# Altium PCB 4.3寸MCU_RGB.PcbDoc
Units mm, origin at the board's own origin, x right, y up, seen from the top; angles counter-clockwise.
Board outline 116.21 x 62.91 mm, 2 copper layers (Top Layer, Bottom Layer); 34 components, 57 nets, 188 pads, 216 vias.
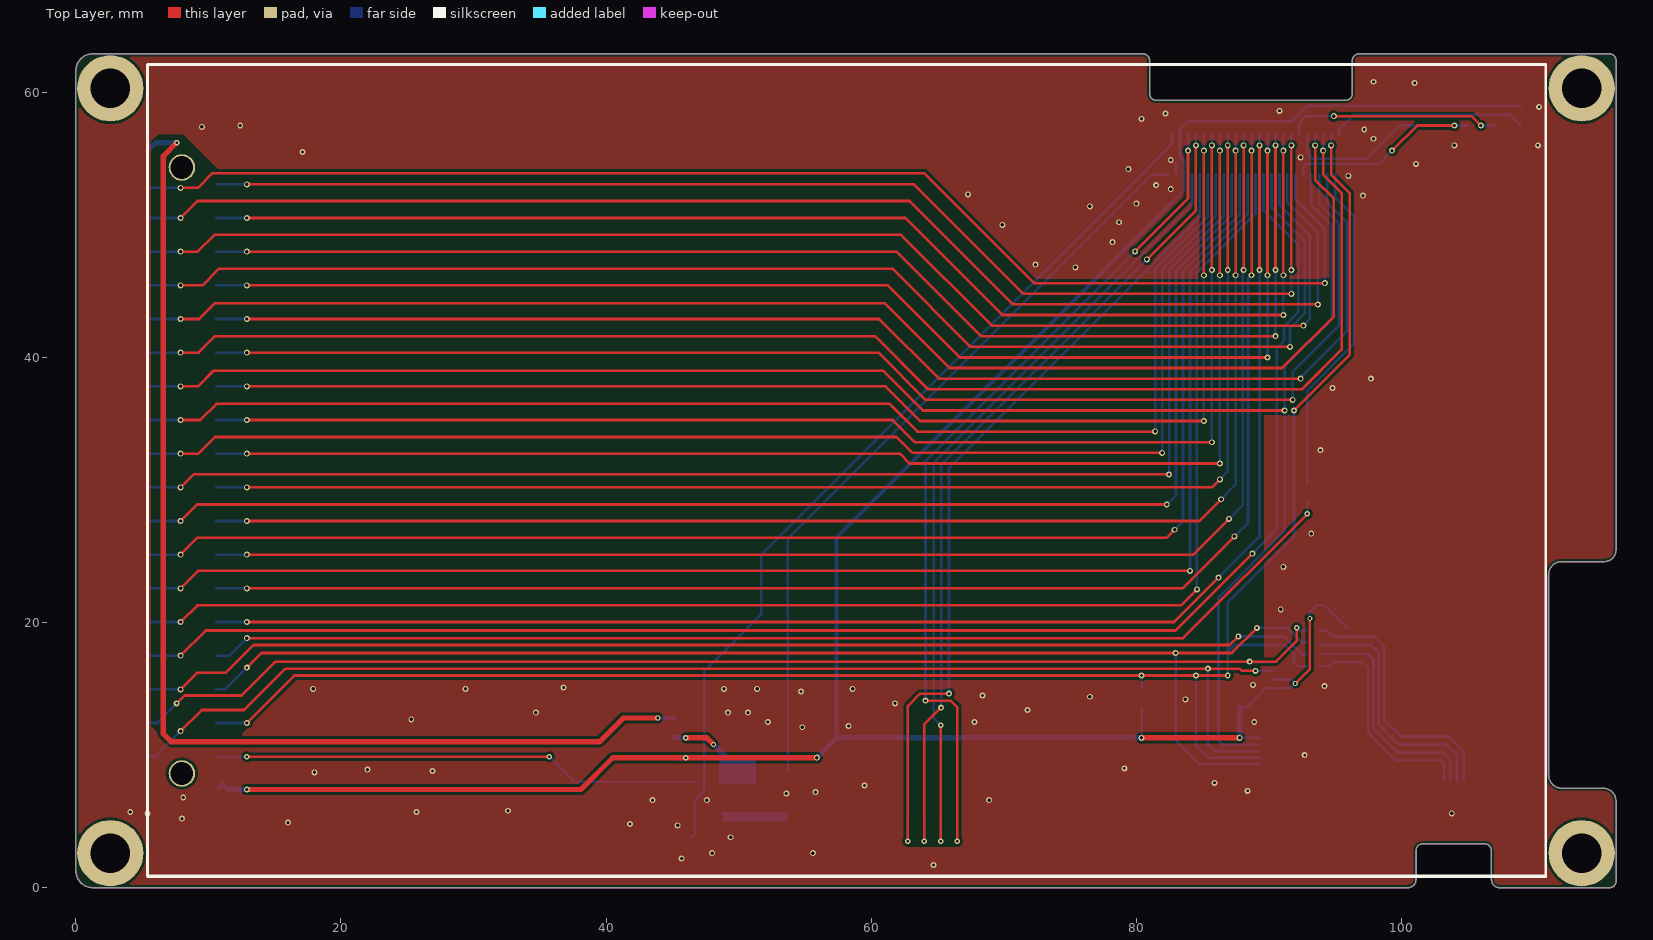
[diagram p0: Top Layer view]
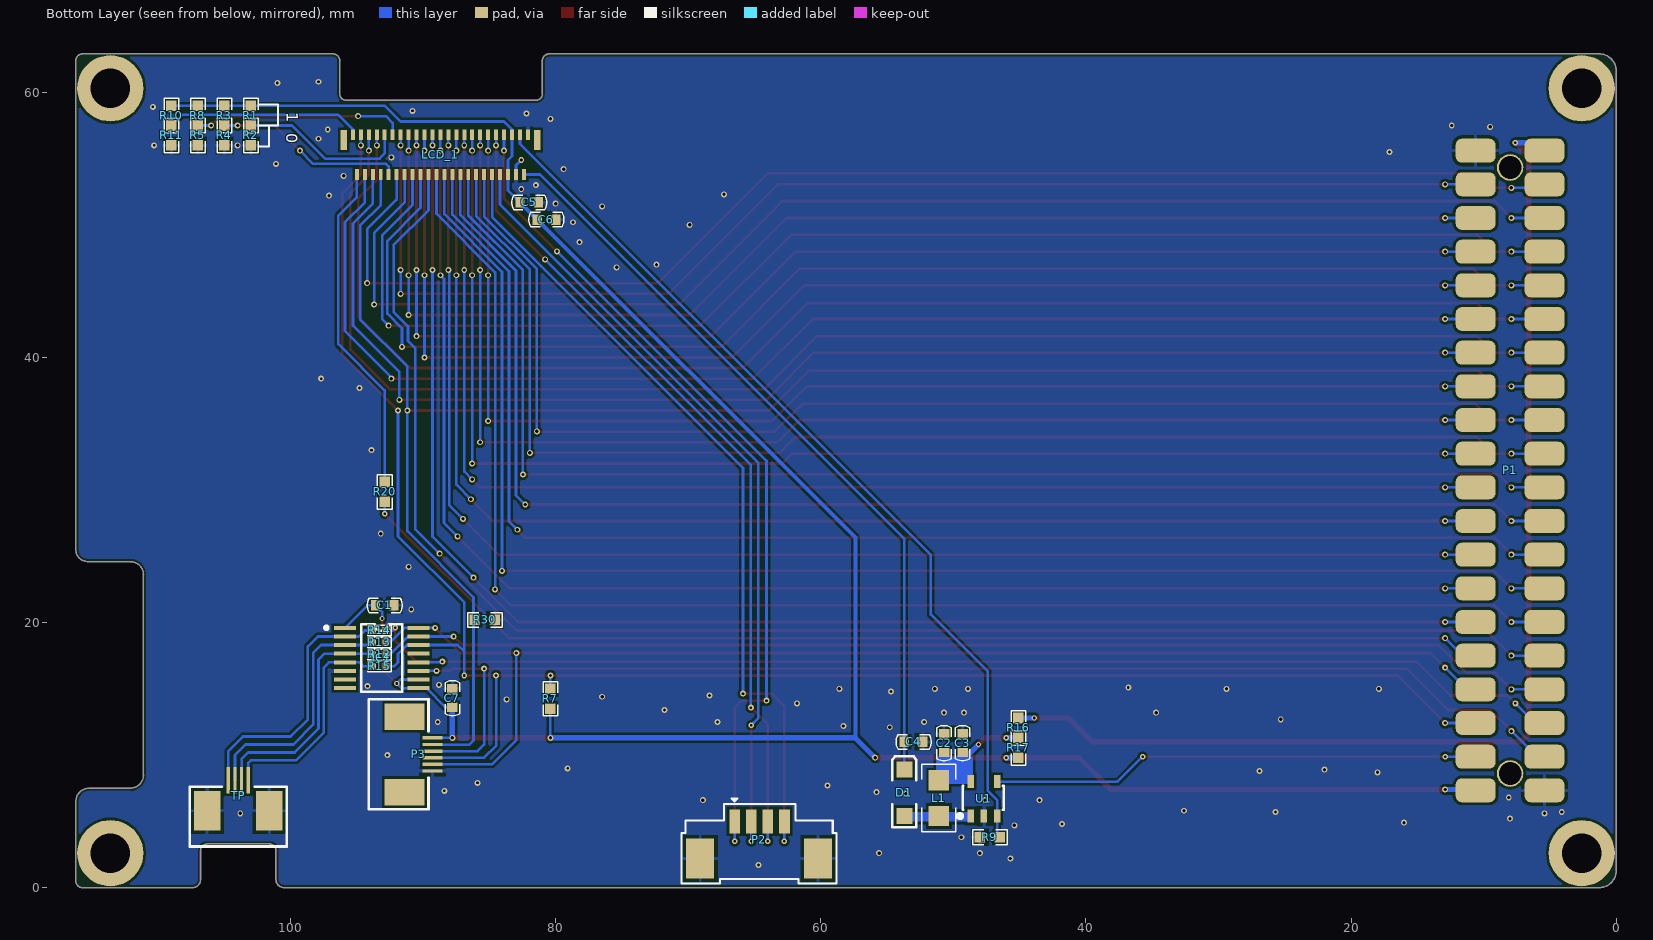
[diagram p1: Bottom Layer view, seen from below]
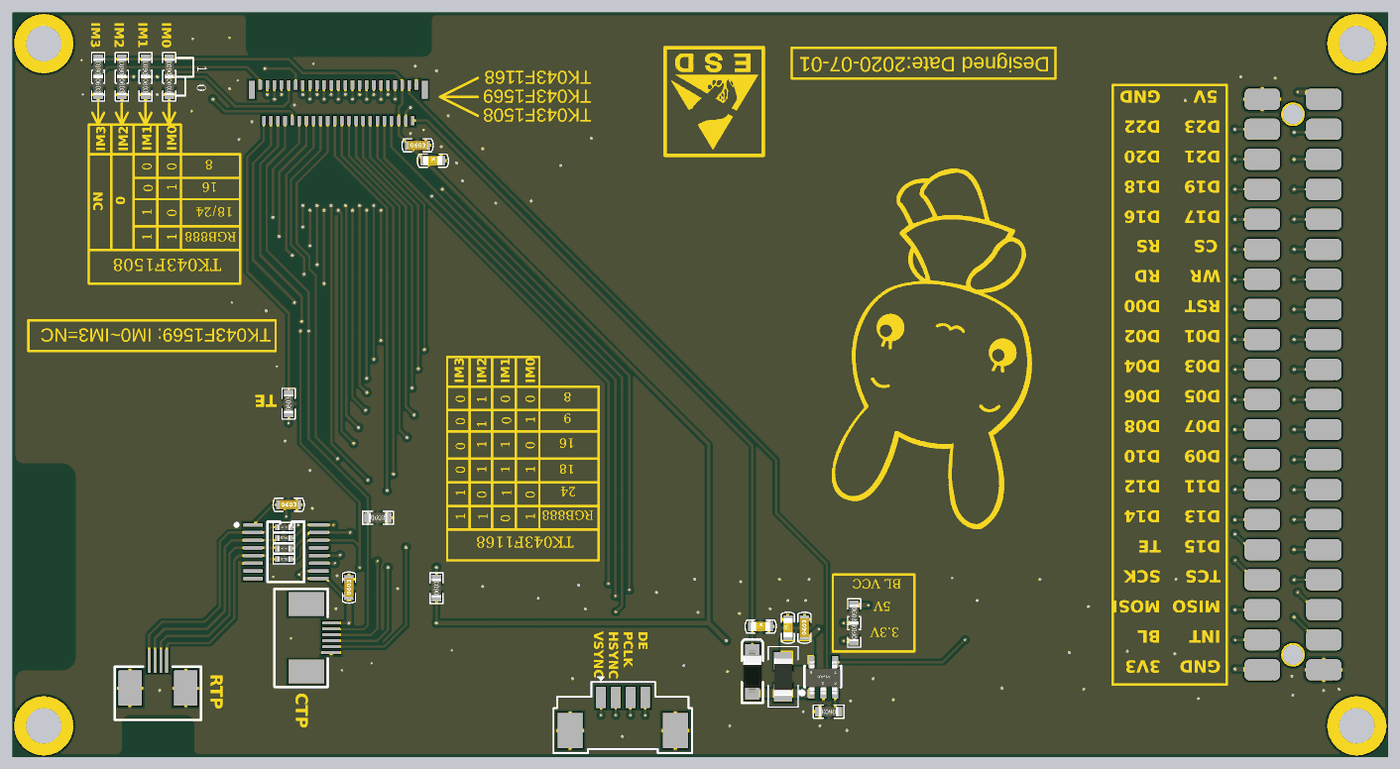
[diagram p2: 3D render of the assembled board from below, using the file's embedded part models]

## Layer stack, top to bottom
Top Solder: solder mask 0.0102, Solder Resist, Dk 3.5
Top Layer: signal copper 0.0356
Dielectric1: dielectric 0.32, FR-4, Dk 4.8
Bottom Layer: signal copper 0.0356
Bottom Solder: solder mask 0.0102, Solder Resist, Dk 3.5

## Board outline
-0.005,1.27 ccw(c1.27,1.27) 1.27,-0.005 100.5,-0.005 ccw(c100.5,0.6) 101.105,0.6 101.105,2.8 cw(c101.6,2.8) 101.6,3.295 106.3,3.295 cw(c106.3,2.8) 106.795,2.8 106.795,0.6 ccw(c107.4,0.6) 107.4,-0.005 115.7,-0.005 ccw(c115.7,0.5) 116.205,0.5 116.205,6.5 ccw(c115.2,6.5) 115.2,7.505 112.1,7.505 cw(c112.1,8.5) 111.105,8.5 111.105,23.6 cw(c112.1,23.6) 112.1,24.595 115.3,24.595 ccw(c115.3,25.5) 116.205,25.5 116.205,62.4 ccw(c115.7,62.4) 115.7,62.905 96.8,62.905 ccw(c96.8,62.4) 96.295,62.4 96.295,59.9 cw(c95.8,59.9) 95.8,59.405 81.5,59.405 cw(c81.5,59.9) 81.005,59.9 81.005,62.4 ccw(c80.5,62.4) 80.5,62.905 1.27,62.905 ccw(c1.27,61.63) -0.005,61.63

## Design rules (kind name [scope] priority, off if disabled: settings)
Clearance [All] p1: gap=0.2
ComponentClearance [All] p1 off: gap=0.254 collisioncheckmode=3 verticalgap=0.254 showdistances=FALSE
Height [All] p1 off: minheight=0 maxheight=25.4 prefheight=12.7
MinimumSolderMaskSliver [All] p1 off: minsoldermaskwidth=0.254
PolygonConnect PolygonConnect_1 [IsVia] p1: connectstyle=Direct reliefconductorwidth=0.254 reliefentries=4 polygonreliefangle="90 Angle" airgapwidth=0.254
PolygonConnect [All] p2: connectstyle=Relief reliefconductorwidth=0.254 reliefentries=4 polygonreliefangle="90 Angle" airgapwidth=0.254
RoutingVias [All] p1: holewidth=0.711 width=1.27 viastyle="Through Hole" minholewidth=0.711 minwidth=1.27 maxholewidth=0.711 maxwidth=1.27
SilkToBoardRegionClearance [All] p1 off:
SilkToSilkClearance [All] p1 off: silktosilkclearance=0.254
SilkToSolderMaskClearance [IsPad] p1 off: minsilkscreentomaskgap=0.254 clearancetoexposedcopper=TRUE
SolderMaskExpansion [All] p1: expansion=0.102
Width [All] p1: maxlimit=1 minlimit=0.2 preferedwidth=0.2 minimp=50.000000 maximp=50.000000 favimp=50.000000
24 further rules are at their usual default settings.

## Components (designator, comment, footprint, x,y, rotation, side; value= is the part's Value field where it differs from the comment)
C1 "104" C0603-1 93.6,21.3 r180 bottom
C2 "475" C0603-2 50.7,10.2 r90 bottom
C3 "104" C0603-1 49.3,10.2 r90 bottom
C4 "104" C0603-2 53.7,11 r180 bottom
C5 "104" C0603-1 82.7,51.7 r180 bottom
C6 "475" C0603-2 81.4,50.4 r180 bottom
C7 "104" C0603-1 87.8,13.6 r90 bottom
D1 "SS14" SOD123 53.7,5.4 r90 bottom
IC1 "XPT2046" SOT403-1 95.9,19.6 r180 bottom locked
L1 "4.7uH" L1206 51.1,5.4 r90 bottom
LCD_1 "TK043F1168_TK043F1508_TK043F1569" TFT_KGM1066A0 111,0.8 r90 top locked
P1 "PIN_Header_40PIN" P_Head_2x20 5.4,55.6 r270 bottom locked
P2 "BHEADSMD1x4" BHEADSMD1x4 66.5,5 r0 bottom
P3 "Capacity_Touch" TP_CAP_4.3INCH 110.3,0.8 r90 top locked
R1 "0R" R0603 103,57.5 r90 bottom
R2 "0R" R0603 103,57.5 r270 bottom
R3 "0R" R0603 105,57.5 r90 bottom
R4 "0R" R0603 105,57.5 r270 bottom
R5 "0R" R0603 107,57.5 r270 bottom
R7 "4.7K" R0603 80.4,13.5 r90 bottom
R8 "0R" R0603 107,57.5 r90 bottom
R9 "5R1" R0603 46.5,3.8 r0 bottom
R10 "0R" R0603 109,57.5 r90 bottom
R11 "0R" R0603 109,57.5 r270 bottom
R12 "0R" R0402 92.8,17.6 r0 bottom
R13 "0R" R0402 92.8,18.5 r0 bottom
R14 "0R" R0402 92.8,19.4 r0 bottom
R15 "0R" R0402 92.8,16.7 r0 bottom
R16 "0R" R0603 45.1,12.8 r270 bottom
R17 "0R" R0603 45.1,9.8 r90 bottom
R20 "0R" R0603 92.9,29.1 r90 bottom
R30 "18K" R0603 86.1,20.2 r180 bottom
TP "Resistor_Touch" TP_5.0inch 110.6,67.1 r270 top locked
U1 "MP3302" SOT23-5 48.7,5.4 r180 bottom

## Footprints (in the part's own frame and the unit in brackets; to place one, negate y for a bottom-side part, rotate by r counter-clockwise, add the part's x,y. Pads: shape width x height; smd on the part's side, far side on the other; paste and mask are expansions set on the pad)
BHEADSMD1x4 [mil]
  rect 32x71 smd: 1(0,0) 2(-49.21,0) 3(-98.43,0) 4(-147.64,0)
  rect 83x118 smd: 5(102.36,110.24) 6(-248.03,110.24)
  silkscreen extent -303,-68 158,185
C0603-1 [mm]
  rect 0.7x0.8 smd mask+0.1: 1(0,0) 2(1.4,0)
  silkscreen extent -0.62,-0.55 2.02,0.55, body extent -0.3,-0.39 1.7,0.39, height 0.79
C0603-2 [mm]
  rect 0.7x0.8 smd mask+0.1: 1(0,0) 2(1.4,0)
  silkscreen extent -0.62,-0.55 2.02,0.55, body extent -0.1,-0.4 1.5,0.4, height 0.3
L1206 [mil]
  rect 60x60 smd: 1(0,0) 2(106.3,0)
  silkscreen extent -47,-50 154,50, body extent -11,-32 115,31, height 43
P_Head_2x20 [mm]
  round 2 hole 1.7: 0(1.27,-2.6) 0(46.99,-2.6)
  rrect50% 1.8x3 smd: 1(0,0) 2(0,-5.2) 3(2.54,0) 4(2.54,-5.2) 5(5.08,0) 6(5.08,-5.2) 7(7.62,0) 8(7.62,-5.2) 9(10.16,0) 10(10.16,-5.2) 11(12.7,0) 12(12.7,-5.2) 13(15.24,0) 14(15.24,-5.2) 15(17.78,0) 16(17.78,-5.2) 17(20.32,0) 18(20.32,-5.2) 19(22.86,0) 20(22.86,-5.2) 21(25.4,0) 22(25.4,-5.2) 23(27.94,0) 24(27.94,-5.2) 25(30.48,0) 26(30.48,-5.2) 27(33.02,0) 28(33.02,-5.2) 29(35.56,0) 30(35.56,-5.2) 31(38.1,0) 32(38.1,-5.2) 33(40.64,0) 34(40.64,-5.2) 35(43.18,0) 36(43.18,-5.2) 37(45.72,0) 38(45.72,-5.2) 39(48.26,0) 40(48.26,-5.2)
R0402 [mm]
  rect 0.5x0.5 smd mask+0.1: 1(0,0) 2(1,0)
  silkscreen extent -0.4,-0.4 1.4,0.4, body extent 0,-0.25 1,0.25, height 0.35
R0603 [mm]
  rect 0.8x0.8 smd mask+0.1: 1(0,0) 2(1.5,0)
  silkscreen extent -0.55,-0.55 2.05,0.55, body extent -0.05,-0.4 1.55,0.4, height 0.45
SOD123 [mm]
  rect 1.2x1.2 smd: 1(0,0) 2(3.5,0)
  silkscreen extent -0.85,-0.9 4.5,0.9, body extent -0.05,-0.8 3.65,0.8, height 1.27
SOT23-5 [mm]
  rect 0.5x1 smd: 1(0,0) 2(1,0) 3(2,0) 4(2,2.6) 5(0,2.6)
  silkscreen extent -0.95,-0.15 2.5,2.27, body extent -0.46,-0.13 2.44,2.67, height 1.09
SOT403-1 [mm]
  rect 1.65x0.3 smd: 1(0,0) 2(0,-0.65) 3(0,-1.3) 4(0,-1.95) 5(0,-2.6) 6(0,-3.25) 7(0,-3.9) 8(0,-4.55) 9(5.55,-4.55) 10(5.55,-3.9) 11(5.55,-3.25) 12(5.55,-2.6) 13(5.55,-1.95) 14(5.55,-1.3) 15(5.55,-0.65) 16(5.55,0)
  silkscreen extent -1.53,-4.83 4.33,0.28
TFT_KGM1066A0 [mm]
  rect 1.5x0.5 smd far side: 0(55.6,15) 0(55.6,29.6)
  rect 0.8x0.3 smd far side: 1(56,15.7) 2(53,16) 3(56,16.3) 4(53,16.6) 5(56,16.9) 6(53,17.2) 7(56,17.5) 8(53,17.8) 9(56,18.1) 10(53,18.4) 11(56,18.7) 12(53,19) 13(56,19.3) 14(53,19.6) 15(56,19.9) 16(53,20.2) 17(56,20.5) 18(53,20.8) 19(56,21.1) 20(53,21.4) 21(56,21.7) 22(53,22) 23(56,22.3) 24(53,22.6) 25(56,22.9) 26(53,23.2) 27(56,23.5) 28(53,23.8) 29(56,24.1) 30(53,24.4) 31(56,24.7) 32(53,25) 33(56,25.3) 34(53,25.6) 35(56,25.9) 36(53,26.2) 37(56,26.5) 38(53,26.8) 39(56,27.1) 40(53,27.4) 41(56,27.7) 42(53,28) 43(56,28.3) 44(53,28.6) 45(56,28.9)
  silkscreen extent 0,0.1 61.3,105.6
TP_5.0inch [mm]
  rect 2x0.25 smd far side: 1(59,-7.4) 2(59,-6.9) 3(59,-6.4) 4(59,-5.9)
  rect 3x2 smd far side: 5(61.3,-9) 6(61.3,-4.3)
  silkscreen extent 5,-105.2 66.2,0.3
TP_CAP_4.3INCH [mm]
  rect 0.25x1.5 smd far side: 1(10.5,21) 2(10,21) 3(9.5,21) 4(9,21) 5(8.5,21) 6(8,21)
  rect 2x3 smd far side: 7(12.1,18.9)
  rect 2x3 smd far side paste+0: 8(6.4,18.9)
  silkscreen extent 0,-0.6 61.3,104.9

## Part data
C1 C2 C3 C4 C5 C6 C7: library part cap
D1: library part "D Schottky", "Schottky Diode"
IC1: library part ADS7843
L1: library part Inductor
LCD_1: library part TK043F1168
P3: library part BHEADSMD1x6
R1 R2 R3 R4 R5 R7 R8 R9 R10 R11 R12 R13 R14 R15 R16 R17 R20 R30: library part Resistor
TP: library part BHEADSMD1x4

## Free pads (board coordinates)
  round 5 hole 3: 2(2.6,2.6) 2(2.6,60.3) 2(113.6,2.6) 2(113.6,60.3)

## Via types
v1: diameter 0.45, hole 0.25, Top Layer to Bottom Layer, tented both sides, 173 vias
v2: diameter 0.45, hole 0.2, Top Layer to Bottom Layer, tented both sides, 27 vias
v3: diameter 0.4, hole 0.2, Top Layer to Bottom Layer, tented both sides, 16 vias

## Nets (pads, with @x,y where several pads share a name; then routed paths per layer and width w, separated by ;. In a path a pad name is that pad's centre, name@x,y a point inside that pad or via, vN(x,y) a via of type N, cw(c..) or ccw(c..) an arc to the next point about the centre after c; other vN are vias at no path point)
3.3V: C1.1 C5.1 C6.1 C7.1 IC1.1 IC1.9 IC1.10 LCD_1.40 LCD_1.41 P1.40 P3.1 R1.2 R3.2 R7.1 R8.2 R10.2 R17.1 | length 185.4
  Top Layer w0.2: v3(92,15.4) 93.1,16.5 v3(93.1,20.3)
  Top Layer w0.4: v1(12.9,7.4) 38.1,7.4 40.5,9.8 v1(55.9,9.8) ; v1(80.4,11.3) v1(87.8,11.3)
  Bottom Layer w0.2: v1(80.4,11.3) R7.1 ; C5.1 83.6,52.6 LCD_1.40 83.6,54.9 83.3,55.2 LCD_1.41 83.3,57.2 83.9,57.8 91.7,57.8 92.9,59 R1.2 R3.2 R8.2 R10.2 ; v1(87.8,11.3) P3.1 ; C7.1 88.3,13.6 89.75,15.05 91.65,15.05 v3(92,15.4) 91.7,15.7 IC1.10 ; v3(93.1,20.3) 93.1,20.8 C1.1 94.2,21.3 IC1.1
  Bottom Layer w0.3: 57.4,11.3 57.4,26.4 C5.1
  Bottom Layer w0.4: P1.40@10.8,7.54 11.06,7.8 11.46,7.4 v1(12.9,7.4) ; R17.1 v3(46,9.8) ; v1(55.9,9.8) 57.4,11.3 v1(80.4,11.3) ; v1(87.8,11.3) C7.1
5V: P1.1 R16.1 | length 87
  Top Layer w0.4: v3(7.6,56.2) 6.6,55.2 6.6,11.6 7.2,11 39.5,11 41.3,12.8 v3(43.9,12.8)
  Bottom Layer w0.4: P1.1 6,56.2 v3(7.6,56.2) ; v3(43.9,12.8) R16.1
BL_CTR: P1.38 U1.4 | length 36.9
  Top Layer w0.2: v3(12.9,9.88) v3(35.72,9.88)
  Bottom Layer w0.2: P1.38 v3(12.9,9.88) ; v3(35.72,9.88) 37.6,8 U1.4
CS: LCD_1.7 P1.11 | length 107.9
  Top Layer w0.2: v1(7.9,42.9) 9.3,42.9 10.5,44.1 27.6,44.1 61,44.1 65.9,39.2 91,39.2 94.9,43.1 94.9,52 93.5,53.4 v1(93.5,56)
  Bottom Layer w0.2: P1.11 v1(7.9,42.9) ; v1(93.5,56) LCD_1.7
D00: LCD_1.35 P1.16 | length 97.1
  Top Layer w0.2: v1(12.9,37.82) 61.08,37.82 63.7,35.2 v1(85.1,35.2) ; v1(85.1,46.2) v1(85.1,55.6)
  Bottom Layer w0.2: P1.16 v1(12.9,37.82) ; v1(85.1,35.2) v1(85.1,46.2) ; v1@85.1,55.7 LCD_1.35
D01: LCD_1.34 P1.17 | length 98.4
  Top Layer w0.2: v1(7.9,35.28) 9.38,35.28 10.6,36.5 42.6,36.5 61.4,36.5 63.5,34.4 v1@81.425,34.4
  Bottom Layer w0.2: P1.17 v1(7.9,35.28) ; v1(81.425,34.425) 81.425,46.662 85.4,50.637 LCD_1.34
D02: LCD_1.33 P1.18 | length 99
  Top Layer w0.2: v1(12.9,35.28) 61.62,35.28 63.3,33.6 v1(85.7,33.6) ; v1(85.7,46.6) v1(85.7,56)
  Bottom Layer w0.2: P1.18 v1(12.9,35.28) ; v1(85.7,33.6) v1(85.7,46.6) ; v1(85.7,56) LCD_1.33
D03: LCD_1.32 P1.19 | length 100.2
  Top Layer w0.2: v1(7.9,32.74) 9.24,32.74 10.5,34 61.9,34 63.1,32.8 v1(81.95,32.8)
  Bottom Layer w0.2: P1.19 v1(7.9,32.74) ; v1(81.95,32.8) 81.95,46.621 86,50.671 LCD_1.32
D04: LCD_1.31 P1.20 | length 100.8
  Top Layer w0.2: v1(12.9,32.74) 62.16,32.74 62.9,32 v1(86.3,32) ; v1(86.3,46.2) v1(86.3,55.6)
  Bottom Layer w0.2: P1.20 v1(12.9,32.74) ; v1(86.3,32) v1(86.3,46.2) ; v1(86.3,55.6) LCD_1.31
D05: LCD_1.30 P1.21 | length 101.8
  Top Layer w0.2: v1(7.9,30.2) 8.9,31.2 v1@82.475,31.2
  Bottom Layer w0.2: P1.21 v1(7.9,30.2) ; v1(82.475,31.175) 82.475,46.58 86.6,50.705 LCD_1.30
D06: LCD_1.29 P1.22 | length 102.2
  Top Layer w0.2: v1(12.9,30.2) 85.7,30.2 v1(86.3,30.8) ; v1(86.9,46.6) v1(86.9,56)
  Bottom Layer w0.2: P1.22 v1(12.9,30.2) ; v1(86.3,30.8) 86.9,31.4 v1(86.9,46.6) ; v1(86.9,56) LCD_1.29
D07: LCD_1.28 P1.23 | length 104.3
  Top Layer w0.2: v1(7.9,27.66) 9.14,28.9 v1(82.3,28.9)
  Bottom Layer w0.2: P1.23 v1(7.9,27.66) ; v1(82.3,28.9) 83,29.6 83,46.54 87.2,50.74 LCD_1.28
D08: LCD_1.27 P1.24 | length 104.3
  Top Layer w0.2: v1(12.9,27.66) 84.76,27.66 v1(86.4,29.3) ; v1(87.5,46.2) v1(87.5,55.6)
  Bottom Layer w0.2: P1.24 v1(12.9,27.66) ; v1(86.4,29.3) 87.5,30.4 v1(87.5,46.2) ; v1@87.5,55.7 LCD_1.27
D09: LCD_1.26 P1.25 | length 107.2
  Top Layer w0.2: v1(7.9,25.12) 9.18,26.4 34,26.4 82.3,26.4 v1(82.9,27) v1@82.855,27.045
  Bottom Layer w0.2: P1.25 v1(7.9,25.12) ; v1(82.9,27) 83.525,27.625 83.525,46.499 87.8,50.774 LCD_1.26
D10: LCD_1.25 P1.26 | length 107
  Top Layer w0.2: v1(12.9,25.12) 84.3,25.12 v1(87,27.82) ; v1(88.1,46.6) v1(88.1,56)
  Bottom Layer w0.2: P1.26 v1(12.9,25.12) ; v1(87,27.82) 88.025,28.845 88.025,46.525 v1(88.1,46.6) ; v1(88.1,56) LCD_1.25
D11: LCD_1.24 P1.27 | length 110.9
  Top Layer w0.2: v1(7.9,22.58) 9.22,23.9 32.05,23.9 v1(84.05,23.9)
  Bottom Layer w0.2: P1.27 v1(7.9,22.58) ; v1(84.05,23.9) 84.05,46.458 88.4,50.808 LCD_1.24
D12: LCD_1.23 P1.28 | length 109.3
  Top Layer w0.2: v1(12.9,22.58) 83.48,22.58 v1(87.4,26.5) ; v1(88.7,46.2) v1(88.7,55.6)
  Bottom Layer w0.2: P1.28 v1(12.9,22.58) ; v1(87.4,26.5) 88.425,27.525 88.425,45.925 v1(88.7,46.2) ; v1(88.7,55.6) LCD_1.23
D13: LCD_1.22 P1.29 | length 113.3
  Top Layer w0.2: v1(7.9,20.04) 9.16,21.3 31.525,21.3 83.375,21.3 v1(84.575,22.5)
  Bottom Layer w0.2: P1.29 v1(7.9,20.04) ; v1(84.575,22.5) 84.575,46.417 89,50.842 LCD_1.22
D14: LCD_1.21 P1.30 | length 111.7
  Top Layer w0.2: v1(12.9,20.04) 82.857,20.04 v1(86.2,23.383) ; v1(89.3,46.6) v1(89.3,56)
  Bottom Layer w0.2: P1.30 v1(12.9,20.04) ; v1(86.2,23.383) 89.3,26.483 v1(89.3,46.6) ; v1(89.3,56) LCD_1.21
D15: LCD_1.20 P1.31 | length 117.7
  Top Layer w0.2: v1(7.9,17.5) 9.8,19.4 31,19.4 82.96,19.4 v1(88.76,25.2)
  Bottom Layer w0.2: P1.31 v1(7.9,17.5) ; v1(88.76,25.2) 90.6,27.04 90.6,40.7 91.15,41.25 91.15,42.35 92.225,43.425 92.225,48.475 89.6,51.1 LCD_1.20
D16: LCD_1.19 P1.10 | length 98.3
  Top Layer w0.2: v1(12.9,45.44) 61.26,45.44 66.7,40 v1(89.9,40) ; v1(89.9,46.2) v1(89.9,55.6)
  Bottom Layer w0.2: P1.10 v1(12.9,45.44) ; v1(89.9,40) v1(89.9,46.2) ; v1@89.9,55.7 LCD_1.19
D17: LCD_1.18 P1.9 | length 103.7
  Top Layer w0.2: v1(7.9,45.44) 9.54,45.44 10.8,46.7 30.4,46.7 61.6,46.7 67.5,40.8 v1(91.6,40.8)
  Bottom Layer w0.2: P1.9 v1(7.9,45.44) ; LCD_1.18 90.2,51.3 92.7,48.8 92.7,43.3 91.6,42.2 v1(91.6,40.8)
D18: LCD_1.17 P1.8 | length 97.7
  Top Layer w0.2: v1(12.9,47.98) 61.92,47.98 68.3,41.6 v1(90.5,41.6) ; v1(90.5,46.6) v1(90.5,56)
  Bottom Layer w0.2: P1.8 v1(12.9,47.98) ; v1(90.5,41.6) v1(90.5,46.6) ; v1(90.5,56) LCD_1.17
D19: LCD_1.16 P1.7 | length 103.1
  Top Layer w0.2: v1(7.9,47.98) 9.18,47.98 10.45,49.25 62.25,49.25 69.1,42.4 v1(92.6,42.4)
  Bottom Layer w0.2: P1.7 v1(7.9,47.98) ; LCD_1.16 90.8,51.5 93.1,49.2 93.1,42.9 v1(92.6,42.4)
D20: LCD_1.15 P1.6 | length 98.2
  Top Layer w0.2: v1(12.9,50.52) 62.58,50.52 69.9,43.2 v1(91.1,43.2) ; v1(91.1,46.2) v1(91.1,55.6)
  Bottom Layer w0.2: P1.6 v1(12.9,50.52) ; v1(91.1,43.2) v1(91.1,46.2) ; v1(91.1,55.6) LCD_1.15 v1@91.1,55.7
D21: LCD_1.14 P1.5 | length 102.8
  Top Layer w0.2: v1(7.9,50.52) 9.18,51.8 29.35,51.8 62.9,51.8 70.7,44 v1(93.7,44)
  Bottom Layer w0.2: P1.5 v1(7.9,50.52) ; LCD_1.14 91.4,51.7 93.7,49.4 v1(93.7,44)
D22: LCD_1.13 P1.4 | length 96.5
  Top Layer w0.2: v1(12.9,53.06) 63.24,53.06 71.5,44.8 v1(91.7,44.8) ; v1(91.7,46.6) v1(91.7,56)
  Bottom Layer w0.2: P1.4 v1(12.9,53.06) ; v1(91.7,44.8) v1(91.7,46.6) ; v1(91.7,56) LCD_1.13
D23: LCD_1.12 P1.3 | length 101.6
  Top Layer w0.2: v1(7.9,52.8) 9.2,52.8 10.3,53.9 28.825,53.9 64,53.9 72.3,45.6 v1(94.225,45.6)
  Bottom Layer w0.2: P1.3@5.66,52.8 v1(7.9,52.8) ; LCD_1.12 92,51.9 94.225,49.675 v1(94.225,45.6)
DE: LCD_1.36 P2.4 | length 62.2
  Top Layer w0.2: v3@62.767,3.517 62.767,13.7 63.7,14.633 v2(65.867,14.633)
  Bottom Layer w0.2: v3(62.75,3.5) P2.4 ; v2(65.867,14.633) 65.867,31.67 84.8,50.602 LCD_1.36
GND: C1.2 C2.2 C3.2 C4.2 C5.2 C6.2 C7.2 IC1.6 LCD_1.42 LCD_1.45 P1.2 P1.39 P2.5 P2.6 P3.6 R2.2 R4.2 R5.2 R9.2 R11.2 R30.2 TP.5 TP.6 U1.2 | length 1.3
  Bottom Layer w0.2: v1(82.6,54.9) 83,54.5 LCD_1.42
  other v1: 64.7,1.7 45.7,2.2 48,2.6 55.6,2.6 49.4,3.8 45.4,4.7 41.8,4.8 16,4.9 8,5.2 5.4,5.6 103.8,5.6 4.1,5.7 25.7,5.7 32.6,5.8 43.5,6.6 47.6,6.6 68.9,6.6 8.1,6.8 53.6,7.1 55.8,7.2 59.5,7.7 18,8.7 26.9,8.8 22,8.9 54.8,12.1 58.3,12.2 52.2,12.5 67.8,12.5 88.9,12.5 25.3,12.7 34.7,13.2 49.2,13.2 50.7,13.2 71.8,13.4 61.8,13.9 83.7,14.2 76.5,14.4 68.4,14.5 54.7,14.8 17.9,15 29.4,15 48.9,15 51.4,15 58.6,15 88.8,15.3 90.9,21 91.1,24.2 93.2,26.7 94.8,37.7 75.4,46.8 72.4,47 78.2,48.7 69.9,50 78.7,50.2 76.5,51.4 80,51.6 97.1,52.2 67.3,52.3 82.6,52.7 96,53.7 79.4,54.2 92.4,55.1 17.1,55.5 104,56 97.9,56.5 9.5,57.4 12.4,57.5 80.4,58 82.2,58.4
  other v2: 88.4,7.3 85.9,7.9 79.1,9 92.7,10 36.8,15.1 94.2,15.2 93.9,33 97.7,38.4 81.5,53 101.1,54.6 110.3,56 97.2,57.2 90.8,58.6 110.4,58.9 101,60.7 97.9,60.8
HSYNC: LCD_1.38 P2.2 | length 60.1
  Top Layer w0.2: v3(65.25,3.5) v3(65.25,12.25)
  Bottom Layer w0.2: v3(65.25,3.5) P2.2 ; v3(65.25,12.25) 64.711,12.789 64.711,32.053 84.2,51.542 LCD_1.38
IM0: LCD_1.9 R1.1 R2.1 | length 12.7
  Bottom Layer w0.2: LCD_1.9 92.9,55.4 93.3,55 97.4,55 99.9,57.5 R2.1
IM1: LCD_1.10 R3.1 R4.1 | length 14.2
  Top Layer w0.2: v1(99.3,55.6) 101.2,57.5 v1(104,57.5)
  Bottom Layer w0.2: LCD_1.10 92.6,54.4 92.8,54.6 98.3,54.6 v1(99.3,55.6) ; v1@104.1,57.5 R4.1
IM2: LCD_1.11 R5.1 R8.1 | length 16.1
  Top Layer w0.2: v1(94.9,58.2) 105.3,58.2 v1(106,57.5)
  Bottom Layer w0.2: LCD_1.11 92.3,57.7 92.8,58.2 v1(94.9,58.2) ; v1(106,57.5) R8.1
IM3: LCD_1.1 R10.1 R11.1 | length 14.9
  Bottom Layer w0.2: LCD_1.1 95.3,57.2 96.4,58.3 108.2,58.3 R10.1
INT: IC1.11 P1.37 P3.3 | length 97.6
  Top Layer w0.2: v1(7.9,11.8) 9.5,13.4 12.7,13.4 15.825,16.525 81.8,16.525 v2(85.4,16.525) 87.8,16.525 87.975,16.35 v2(89,16.35)
  Bottom Layer w0.2: P1.37 5.98,9.88 v1(7.9,11.8) ; v2(85.4,16.525) 85.4,10.8 85.9,10.3 P3.3 ; v2(89,16.35) IC1.11
LEDA: C4.1 D1.2 LCD_1.44 | length 57.5
  Bottom Layer w0.2: D1.2 53.7,10.1 C4.1 53.7,26.3 81.2,53.8 LCD_1.44
LEDK: LCD_1.43 R9.1 U1.3 | length 68.2
  Bottom Layer w0.2: R9.1@46.4,3.9 R9.1 ; R9.1@46.7,4 U1.3@46.7,5.7 ; U1.3 46.7,6.6 47.4,7.3 47.4,16.3 51.7,20.6 51.7,25.1 82.7,56.1 LCD_1.43
NetC2_1: C2.1 C3.1 L1.2 R16.2 R17.2 U1.5 | length 4.8
  Top Layer w0.4: v3(46,11.3) 47.6,11.3 v3(48.1,10.8)
  Bottom Layer w0.4: R16.2 v3(46,11.3) ; v3(48.1,10.8) 49.2,9.7
NetD1_1: D1.1 L1.1 U1.1
NetP1_32: P1.32 R20.1 | length 87.6
  Top Layer w0.2: v1(12.9,18.825) 83.525,18.825 v3(92.9,28.2)
  Bottom Layer w0.2: P1.32 11.575,17.5 v1(12.9,18.825) ; v3(92.9,28.2) R20.1
PCLK: LCD_1.37 P2.3 | length 63.3
  Top Layer w0.2: v3(64,3.5) 64,12.3 v2(65.283,13.583) ; v1(80.8,47.4) 84.5,51.1 v1(84.5,56)
  Bottom Layer w0.2: v3(64,3.5) P2.3 ; v2(65.283,13.583) 65.283,31.883 v1(80.8,47.4) ; v1(84.5,56) LCD_1.37
RD: LCD_1.6 P1.14 | length 101.7
  Top Layer w0.2: v1(12.9,40.36) 60.54,40.36 64.1,36.8 v1(91.8,36.8)
  Bottom Layer w0.2: P1.14 v1(12.9,40.36) ; v1(91.8,36.8) 91.8,38.9 95.3,42.4 95.3,50.1 93.8,51.6 LCD_1.6
RS: LCD_1.4 P1.12 | length 101.1
  Top Layer w0.2: v1(12.9,42.9) 60.6,42.9 65.1,38.4 v1(92.4,38.4)
  Bottom Layer w0.2: P1.12 v1(12.9,42.9) ; v1(92.4,38.4) 92.4,38.5 95.9,42 95.9,50.2 94.4,51.7 LCD_1.4
RST: LCD_1.8 P1.15 P3.2 R30.1 | length 137.6
  Top Layer w0.2: v1(7.9,37.82) 9.22,37.82 10.4,39 60.9,39 63.9,36 v1(91.2,36)
  Bottom Layer w0.2: P1.15 v1(7.9,37.82) ; P3.2@89.3,10.775 86.525,10.775 86.2,11.1 86.2,21.898 91.2,26.898 v1(91.2,36) 91.2,39.3 94.75,42.85 94.75,49.95 93.2,51.5 LCD_1.8
SCL: IC1.16 P1.34 P3.5 R13.1 | length 98.2
  Top Layer w0.2: v2(12.9,16.6) 14,17.7 87.2,17.7 v2(89.1,19.6)
  Bottom Layer w0.2: P1.34 11.26,14.96 v2(12.9,16.6) ; v1(82.975,17.7) 82.975,11.125 84.8,9.3 P3.5 ; v2(89.1,19.6) IC1.16 91.393,19.6 92.493,18.5 R13.1
SDA: IC1.14 LCD_1.3 P1.36 P3.4 R7.2 R15.1 | length 141.6
  Top Layer w0.2: v1(12.9,12.42) 16.48,16 v1(80.4,16) v2(86.9,16) ; v1(91.9,36) 96.1,40.2 96.1,52.4 94.7,53.8 v1(94.7,56)
  Bottom Layer w0.2: P1.36 v1(12.9,12.42) ; R7.2 v1(80.4,16) ; v1(84.5,16) 84.5,10.7 85.4,9.8 P3.4 ; v2(86.9,16) 86.9,17.8 ; v1(91.9,36) 91.9,26.5 86.9,21.5 86.9,17.8 ; R15.1 92.2,16.7 91.9,17 91.9,17.634 91.234,18.3 IC1.14 87.4,18.3 86.9,17.8 ; v1(94.7,56) LCD_1.3
T_BUSY: IC1.13
T_CS: IC1.15 P1.33 R12.1 | length 89.6
  Top Layer w0.2: v1(7.9,14.96) 9.14,16.2 11.3,16.2 13.4,18.3 80.4,18.3 84.3,18.3 87.05,18.3 v2(87.7,18.95)
  Bottom Layer w0.2: P1.33 v1(7.9,14.96) ; v2(87.7,18.95) IC1.15 91.15,18.95 92.5,17.6 R12.1
T_MISO: IC1.12 P1.35 R14.1 | length 92.9
  Top Layer w0.2: v2(7.6,13.9) 8.2,14.5 12.5,14.5 15.05,17.05 v2(88.55,17.05) 90.55,17.05 92.1,18.6 v3(92.1,19.6)
  Bottom Layer w0.2: P1.35 6.22,12.42 6.22,12.52 v2(7.6,13.9) ; v2(88.55,17.05) 88.6,17 IC1.12 ; v3(92.1,19.6) 92.3,19.4 R14.1
TE: LCD_1.2 R20.2 | length 25.3
  Bottom Layer w0.2: R20.2@92.9,30.5 92.9,37.5 96.4,41 96.4,50.7 95,52.1 LCD_1.2
VSYNC: LCD_1.39 P2.1 | length 65.1
  Top Layer w0.2: v2(64.1,14.108) 65.992,14.108 66.5,13.6 v3(66.5,3.5) ; v1(79.9,48) 83.9,52 v1(83.9,55.6)
  Bottom Layer w0.2: v2(64.1,14.108) 64.1,32.2 v1(79.9,48) ; v3(66.5,3.5) P2.1 ; v1(83.9,55.6) LCD_1.39
WR: LCD_1.5 P1.13 | length 110.2
  Top Layer w0.2: v1(7.9,40.36) 9.26,40.36 10.5,41.6 27.075,41.6 60.3,41.6 64.3,37.6 92.5,37.6 95.5,40.6 95.5,52.4 94.1,53.8 v1(94.1,55.6)
  Bottom Layer w0.2: P1.13 v1(7.9,40.36) ; v1@94.1,55.7 LCD_1.5
XL: IC1.4 R12.2 TP.2 | length 17.8
  Bottom Layer w0.2: R12.2@93.85,17.65 IC1.4 97.45,17.65 97.7,17.4 97.9,17.2 97.9,12 99.7,10.2 103.2,10.2 103.7,9.7 TP.2
XR: IC1.2 R14.2 TP.4 | length 20.1
  Bottom Layer w0.2: R14.2 94.4,19.4 94.85,18.95 IC1.2 97.95,18.95 98.7,18.2 98.7,12.7 100,11.4 103.6,11.4 104.7,10.3 TP.4
YD: IC1.5 R15.2 TP.1 | length 16.8
  Bottom Layer w0.2: R15.2 94.5,16.7 94.8,17 IC1.5 97.1,17 97.5,16.6 97.5,11.7 99.6,9.6 103,9.6 103.2,9.4 TP.1
YU: IC1.3 R13.2 TP.3 | length 19
  Bottom Layer w0.2: R13.2 94,18.3 IC1.3 97.7,18.3 98.3,17.7 98.3,12.3 99.8,10.8 103.4,10.8 104.2,10 TP.3
pads on no net: IC1.7 IC1.8 LCD_1.0 P1.0 P3.7 P3.8

## Polygon pours and split planes (outlines as drawn)
GND on Top Layer "Top-No Net" (solid, remove dead copper, pour order 2): -1,0 -1,62.9 116.2,62.9 116.2,0 96.3,0
GND on Bottom Layer "Top-No Net" (solid, remove dead copper, pour order 0): -1,0 -1,62.9 116.2,62.9 116.2,0 96.3,0

## Keep-outs
Keep-Out Layer:
  lines w0.01: 115.7,0 ccw(c115.7,0.5) 116.2,0.5 116.2,6.5 ccw(c115.2,6.5) 115.2,7.5 112.1,7.5 cw(c112.1,8.5) 111.1,8.5 111.1,23.6 cw(c112.1,23.6) 112.1,24.6 115.3,24.6 ccw(c115.3,25.5) 116.2,25.5 116.2,62.4 ccw(c115.7,62.4) 115.7,62.9 96.8,62.9 ccw(c96.8,62.4) 96.3,62.4 96.3,59.9 cw(c95.8,59.9) 95.8,59.4 90,59.4 81.5,59.4 cw(c81.5,59.9) 81,59.9 81,62.4 ccw(c80.5,62.4) 80.5,62.9 1.27,62.9 ccw(c1.27,61.63) 0,61.63 0,1.27 ccw(c1.27,1.27) 1.27,0 18,0 41.3,0 100.5,0 ccw(c100.5,0.6) 101.1,0.6 101.1,2.8 cw(c101.6,2.8) 101.6,3.3 106.3,3.3 cw(c106.3,2.8) 106.8,2.8 106.8,0.6 ccw(c107.4,0.6) 107.4,0 115.7,0 ; 115.7,0 115.7,0

## Other copper
Top Layer:
  pour cut-out: 62.75,3.092 66.5,3.092 66.5,3.5 62.75,3.5
  pour cut-out: 5.7,12.2 7.1,10.8 12.5,10.8 12.5,11.6 16.7,15.8 16.7,48.2 8.1,56.8 6.2,56.8 5.7,56.3
  pour cut-out: 89.6,17.1 89.6,36.3 87.8,38.1 85,38.1 84.6,37.7
Bottom Layer:
  rectangle net NetC2_1: 48.5,7.8 51.3,9.9
  rectangle net NetD1_1: 48.8,5 53.7,5.7

## Silkscreen, mask and mechanical layers (free items; w line width, h text height)
Bottom Overlay:
  lines w0.15: 101.65,57.5 101.65,55.9 102.4,55.9 ; 102.4,57.5 100.95,57.5 100.95,59.1 102.4,59.1
  text "1" at 100.6,58.5 h1.5 r90
  text "0" at 100.65,56.9 h1.5 r90
Top Solder:
  lines w0.4: 111.175,34.125 115.575,34.125 115.575,48.925 111.175,48.925 111.175,34.125
  text "AC1590" at 114.675,35.025 h4 r90
Bottom Solder:
  drawing of 4674 lines, arcs and shapes, not listed
  text "IM0" at 103.6,62.1 h1.5 r90
  text "IM1" at 105.6,62.1 h1.5 r90
  text "IM2" at 107.6,62.1 h1.5 r90
  text "IM3" at 109.6,62.1 h1.5 r90
  text "Designed Date:2020-07-01" at 28.575,59.156 h2 r180
  text "TK043F1168" at 67.3,58 h1.8 r180
  text "TK043F1569" at 67.3,56.4 h1.8 r180
  text "5V" at 14.362,56.332 h2 r180
  text "GND" at 19.188,56.332 h2 r180
  text "TK043F1508" at 67.3,54.8 h1.8 r180
  text "D23" at 14.108,53.792 h2 r180
  text "D22" at 19.188,53.792 h2 r180
  text "D21" at 14.108,51.252 h2 r180
  text "D20" at 19.188,51.252 h2 r180
  text "IM0" at 102.4,51.25 h1.5 r270
  text "IM1" at 104.5,51.25 h1.5 r270
  text "IM2" at 106.5,51.2 h1.5 r270
  text "IM3" at 108.4,51.2 h1.5 r270
  text "8" at 99.3,50.45 h1.5 r180
  text "0" at 102.4,50.25 h1.5 r270
  text "0" at 104.5,50.25 h1.5 r270
  text "D19" at 14.108,48.712 h2 r180
  text "D18" at 19.188,48.712 h2 r180
  text "16" at 98.9,48.55 h1.5 r180
  text "1" at 102.4,47.85 h1.5 r270
  text "NC" at 109.4,47.8 h1.5 r90
  text "0" at 104.4,47.75 h1.5 r270
  text "0" at 107.5,47.4 h1.5 r90
  text "18/24" at 97.6,46.45 h1.5 r180
  text "D17" at 14.108,46.172 h2 r180
  text "D16" at 19.188,46.172 h2 r180
  text "1" at 104.5,45.75 h1.5 r270
  text "0" at 102.4,45.65 h1.5 r270
  text "RGB888" at 97.3,44.35 h1.5 r180
  text "CS" at 14.362,43.692 h2 r180
  text "RS" at 19.188,43.692 h2 r180
  text "1" at 102.4,43.65 h1.5 r270
  text "1" at 104.5,43.65 h1.5 r270
  text "TK043F1508" at 98.6,42.1 h2 r180
  text "WR" at 14.108,41.152 h2 r180
  text "RD" at 19.188,41.152 h2 r180
  text "RST" at 14.108,38.612 h2 r180
  text "D00" at 19.188,38.612 h2 r180
  text "TK043F1569: IM0~IM3=NC" at 94.4,36.2 h1.8 r180
  text "D01" at 14.108,36.072 h2 r180
  text "D02" at 19.188,36.072 h2 r180
  text "D03" at 14.108,33.532 h2 r180
  text "D04" at 19.188,33.532 h2 r180
  text "IM0" at 72.1,31.6 h1.5 r270
  text "IM1" at 74.2,31.6 h1.5 r270
  text "IM2" at 76.2,31.6 h1.5 r270
  text "IM3" at 78.1,31.6 h1.5 r270
  text "D05" at 14.108,30.992 h2 r180
  text "D06" at 19.188,30.992 h2 r180
  text "8" at 69,30.8 h1.5 r180
  text "0" at 72.1,30.6 h1.5 r270
  text "0" at 74.2,30.6 h1.5 r270
  text "0" at 78,30.6 h1.5 r270
  text "TE" at 93.9,30.6 h2 r180
  text "1" at 76.2,29.9 h1.5 r270
  text "9" at 69,29 h1.5 r180
  text "0" at 78,28.7 h1.5 r270
  text "D07" at 14.108,28.452 h2 r180
  text "D08" at 19.188,28.452 h2 r180
  text "1" at 72.1,28.2 h1.5 r270
  text "0" at 74.1,28.1 h1.5 r270
  text "1" at 76.2,27.8 h1.5 r270
  text "16" at 68.7,26.9 h1.5 r180
  text "0" at 78,26.6 h1.5 r270
  text "1" at 74.2,26.1 h1.5 r270
  text "1" at 76.2,26.1 h1.5 r270
  text "0" at 72.1,26 h1.5 r270
  text "D09" at 14.108,25.912 h2 r180
  text "D10" at 19.188,25.912 h2 r180
  text "18" at 68.7,24.7 h1.5 r180
  text "0" at 78,24.6 h1.5 r270
  text "1" at 72.1,24 h1.5 r270
  text "1" at 74.2,24 h1.5 r270
  text "1" at 76.2,24 h1.5 r270
  text "D11" at 14.108,23.372 h2 r180
  text "D12" at 19.188,23.372 h2 r180
  text "24" at 68.6,22.8 h1.5 r180
  text "0" at 72.1,22.5 h1.5 r270
  text "0" at 76.2,22.5 h1.5 r270
  text "1" at 74.1,22 h1.5 r270
  text "1" at 78,22 h1.5 r270
  text "D13" at 14.108,20.832 h2 r180
  text "D14" at 19.188,20.832 h2 r180
  text "RGB888" at 67.1,20.8 h1.5 r180
  text "0" at 74.2,20.5 h1.5 r270
  text "1" at 72.1,20 h1.5 r270
  text "1" at 76.1,20 h1.5 r270
  text "1" at 78,20 h1.5 r270
  text "TK043F1168" at 68.8,18.6 h1.8 r180
  text "D15" at 14.108,18.292 h2 r180
  text "TE" at 19.188,18.292 h2 r180
  text "TCS" at 14.108,15.752 h2 r180
  text "SCK" at 19.188,15.752 h2 r180
  text "BL VCC" at 41.1,15 h1.5 r180
  text "MISO" at 14.108,13.212 h2 r180
  text "MOSI" at 19.188,13.212 h2 r180
  text "5V" at 42,13.1 h1.5 r180
  text "3.3V" at 41.3,10.9 h1.5 r180
  text "INT" at 14.108,10.672 h2 r180
  text "BL" at 19.188,10.672 h2 r180
  text "DE" at 63.324,10.6 h1.5 r90
  text "PCLK" at 64.575,10.6 h1.5 r90
  text "HSYNC" at 65.825,10.6 h1.5 r90
  text "VSYNC" at 67.076,10.6 h1.5 r90
  text "GND" at 14.108,8.132 h2 r180
  text "3V3" at 19.188,8.132 h2 r180
  text "RTP" at 99.5,7 h2 r90
  text "CTP" at 92.3,5.4 h2 r90